# Altium PCB PCBjfet.PcbDoc
Units mm, origin at the board's own origin, x right, y up, seen from the top; angles counter-clockwise.
Board outline 70 x 50 mm, 2 copper layers (Top Layer, Bottom Layer); 10 components, 5 nets, 16 pads, 0 vias.
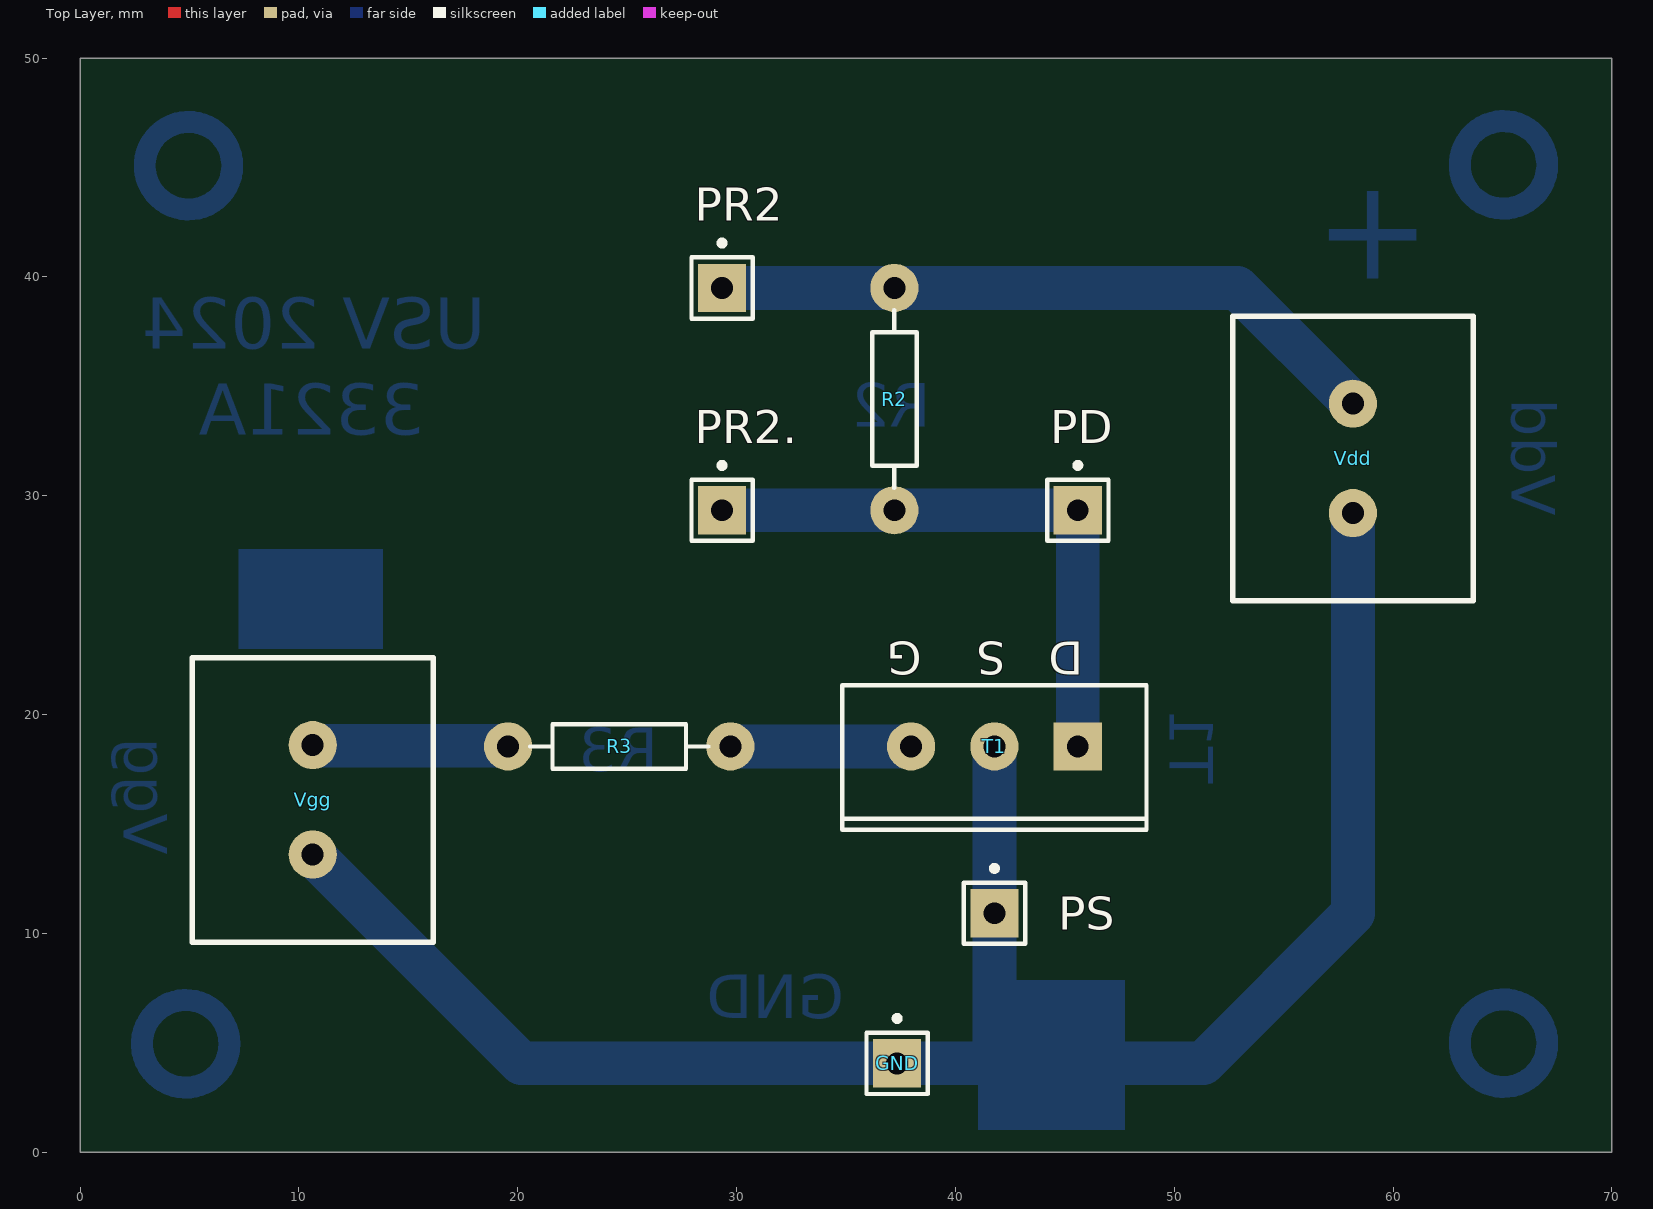
[diagram p0: Top Layer view]
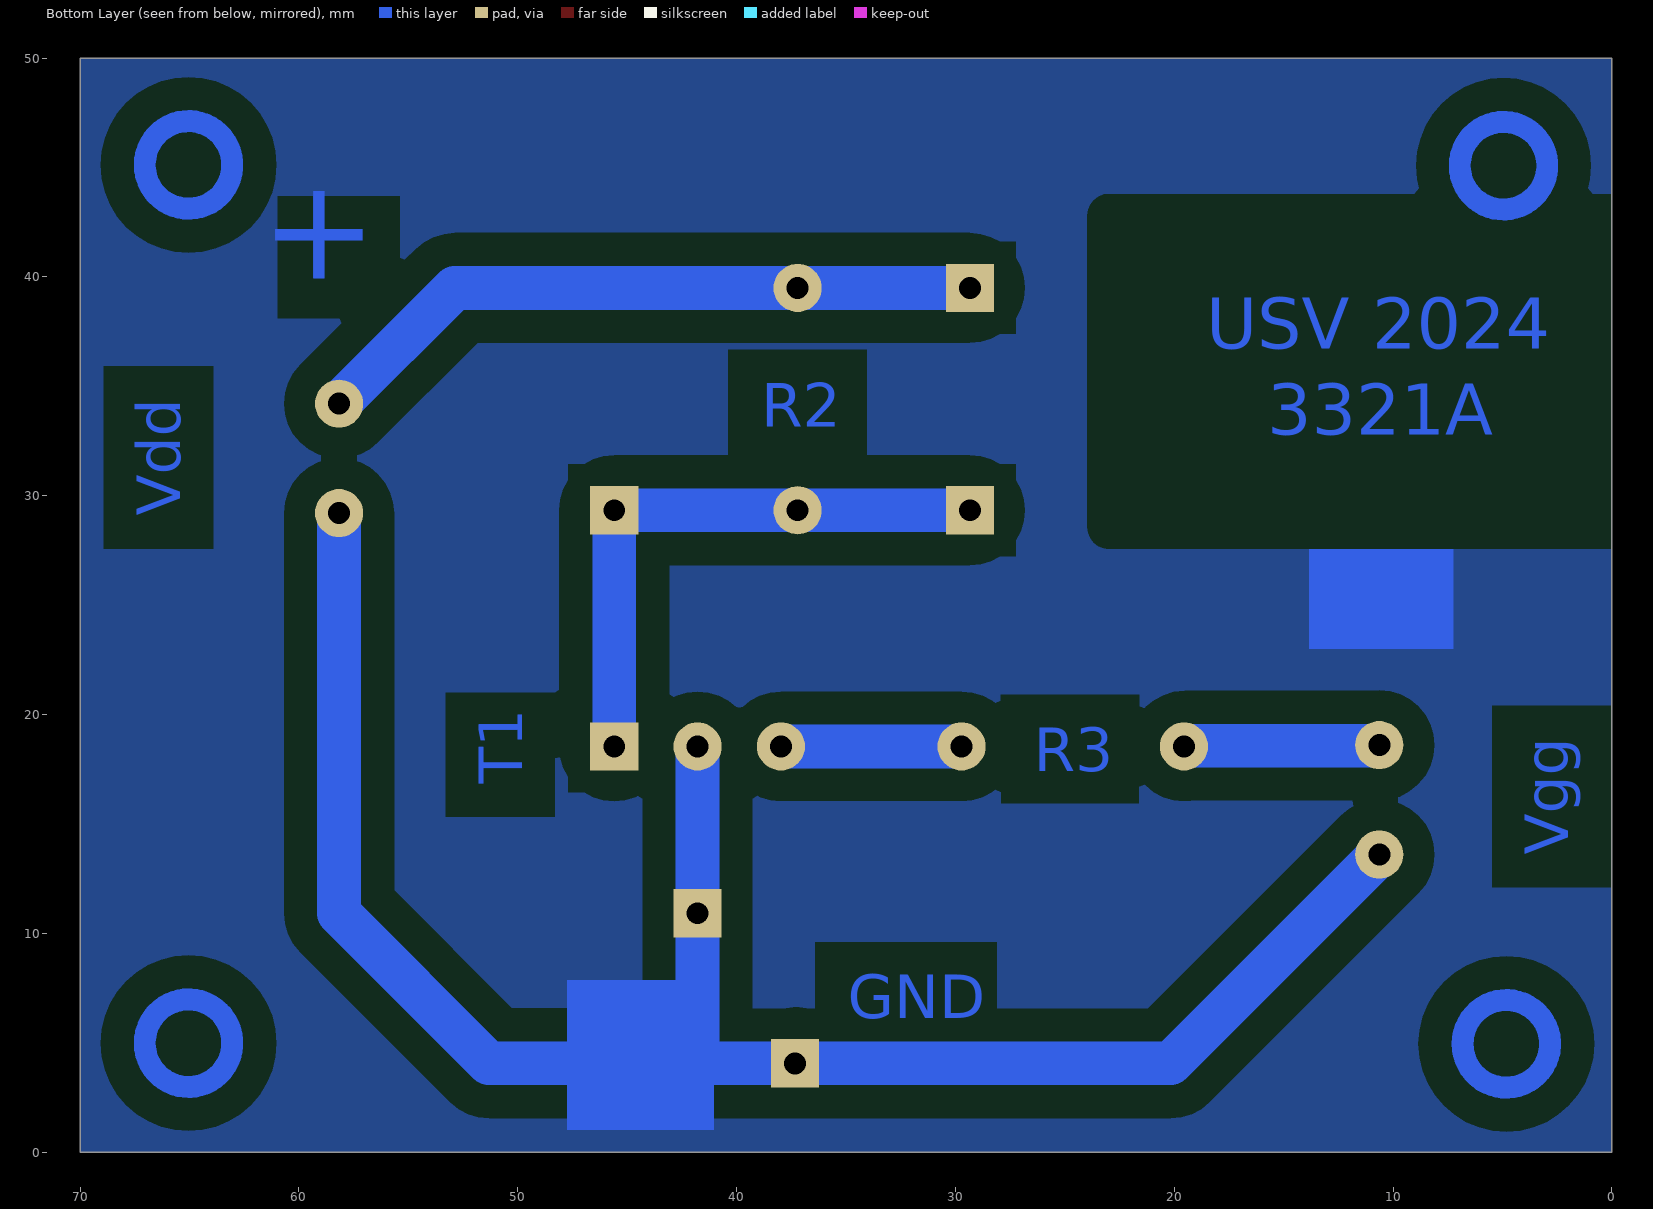
[diagram p1: Bottom Layer view, seen from below]

## Layer stack, top to bottom
Top Solder: solder mask 0.0102, Solder Resist, Dk 3.5
Top Layer: signal copper 0.0356
Dielectric 1: dielectric 0.32, FR-4, Dk 4.8
Bottom Layer: signal copper 0.0356
Bottom Solder: solder mask 0.0102, Solder Resist, Dk 3.5

## Board outline
0,0 0,50 70,50 70,0

## Design rules (kind name [scope] priority, off if disabled: settings)
Clearance [All] p1: gap=0.254 ignorepadtopadclearanceinfootprint=FALSE except(1: SMDPad-Fill SMDPad-Poly SMDPad-Region THPad-Fill THPad-Poly THPad-Region Via-Fill Via-Poly Via-Region Fill-Fill Fill-Poly Fill-Region Fill-Text Poly-Poly Poly-Region Poly-Text Region-Region Region-Text; 1.5: Arc-Fill Arc-Poly Arc-Region Track-Fill Track-Poly Track-Region)
PolygonConnect [All] p1: connectstyle=Relief reliefconductorwidth=0.254 reliefentries=4 polygonreliefangle="90 Angle" airgapwidth=0.254
RoutingVias [All] p1: holewidth=0.711 width=1.27 viastyle="Through Hole" minholewidth=0.711 minwidth=1.27 maxholewidth=0.711 maxwidth=1.27
SolderMaskExpansion [All] p1: expansion=0.102 istentingtop=FALSE
SupplyNets "Schematic Supply Nets" [InNet('GND')] p1: voltage=0.000
UnpouredPolygon [All] p1: allowunpoured=TRUE
Width [All] p1: maxlimit=3 minlimit=0.254 preferedwidth=0.8 minimp=50.000000 maximp=50.000000 favimp=50.000000
29 further rules are at their usual default settings.

## Components (designator, comment, footprint, x,y, rotation, side; value= is the part's Value field where it differs from the comment)
GND "Plug" PIN1 37.338,4.064 r0 top
PD "Plug" PIN1 45.593,29.337 r0 top
PR2 "Plug" PIN1 29.337,39.497 r0 top
PR2. "Plug" PIN1 29.337,29.337 r0 top
PS "Plug" PIN1 41.783,10.922 r0 top
R2 "Res2" AXIAL-0.4 37.211,34.417 r90 top value=470K
R3 "Res2" AXIAL-0.4 24.638,18.542 r0 top value=33K
T1 "JFET-N" TO-254-AA 41.783,18.542 r180 top
Vdd "Component_1" PCBComponent_1 52.666,25.21 r0 top
Vgg "Component_1" PCBComponent_1 16.129,22.606 r180 top

## Footprints (in the part's own frame and the unit in brackets; to place one, negate y for a bottom-side part, rotate by r counter-clockwise, add the part's x,y. Pads: shape width x height; smd on the part's side, far side on the other; paste and mask are expansions set on the pad)
AXIAL-0.4 [mm] "Axial Device, Thru-Hole; 2 Leads; 0.4 in Pin Spacing"
  round 2.2 hole 1: 1(-5.08,0) 2(5.08,0)
  silkscreen extent -4.06,-1.02 4.06,1.02
PCBComponent_1 [mm]
  round 2.2 hole 1: 1(5.5,4) 2(5.5,9)
  silkscreen extent 0,0 11,13
PIN1 [mm] "Connector; Plug"
  rect 2.2x2.2 hole 1: 1(0,0)
  silkscreen extent -1.4,-1.4 1.4,2.17
TO-254-AA [mm] "TO, Thru-Hole, Vertical, Heatsink Mounted; 3 In-Line Leads; Pitch 3.81 mm"
  rect 2.2x2.2 hole 1: 1(-3.81,0)
  round 2.2 hole 1: 2(0,0) 3(3.81,0)
  silkscreen extent -6.95,-2.8 6.95,3.8

## Part data
GND PD PR2 PR2. PS: library part CMP-022-000003-1, Component Type=Standard, Design Item ID=Plug, LatestRevisionDate=17-Jul-2002, LatestRevisionNote="Re-released for DXP Platform.", Pin Count=1, Publisher="Altium Limited", Source="Miscellaneous Connectors.SchLib"
R2 R3: "Resistor", LatestRevisionDate=17-Jul-2002, LatestRevisionNote="Re-released for DXP Platform.", PackageDescription="Axial Device, Thru-Hole; 2 Leads; 0.4 in Pin Spacing", PackageReference=AXIAL-0.4, Published=8-Jun-2000, Publisher="Altium Limited"
T1: library part CMP-019-000008-1, "N-Channel JFET", Code_JEDEC=TO-254-AA, Component Type=Standard, Design Item ID=JFET-N, LatestRevisionDate=17-Jul-2002, LatestRevisionNote="Re-released for DXP Platform.", PackageReference=TO-254-AA, Pin Count=3, Published=8-Jun-2000, Publisher="Altium Limited", Source="Miscellaneous Devices.SchLib"
Vdd Vgg: library part CMP-041-000000-1, Design Item ID=Component_1, Source=HeaderCustom0_5.SchLib

## Nets (pads, with @x,y where several pads share a name; then routed paths per layer and width w, separated by ;. In a path a pad name is that pad's centre, name@x,y a point inside that pad or via, vN(x,y) a via of type N, cw(c..) or ccw(c..) an arc to the next point about the centre after c; other vN are vias at no path point)
GND: GND.1 PS.1 T1.2 Vdd.1 Vgg.2 | length 87.2
  Bottom Layer w2: Vgg.2 20.171,4.064 GND.1 ; GND.1@37.274,4.127 GND.1 ; T1.2 PS.1 41.783,8.128 41.783,4.064 ; Vdd.1 58.166,10.922 51.308,4.064 41.783,4.064 ; GND.1 41.783,4.064
NetPD_1: PD.1 PR2..1 R2.1 T1.1 | length 27.1
  Bottom Layer w2: PR2..1 R2.1 PD.1 T1.1
NetPR2_1: PR2.1 R2.2 Vdd.2 | length 31
  Bottom Layer w2: PR2.1 R2.2 52.879,39.497 Vdd.2
NetR3_1: R3.1 Vgg.1 | length 9
  Bottom Layer w2: Vgg.1 10.661,18.574 19.526,18.574 R3.1
NetR3_2: R3.2 T1.3 | length 8.3
  Bottom Layer w2: R3.2 T1.3
copper on no net: | length 50.3
  Bottom Layer w1: 6.826,4.953 ccw(c4.826,4.953) 6.826,4.953 ; 6.953,45.085 ccw(c4.953,45.085) 6.953,45.085 ; 67.046,4.986 ccw(c65.046,4.986) 67.046,4.986 ; 67.046,45.118 ccw(c65.046,45.118) 67.046,45.118

## Polygon pours and split planes (outlines as drawn)
no net on Bottom Layer "NONET_L02_P000" (solid, pour order 0): 0,50 70,50 70,0 0,0

## Other copper
Bottom Layer:
  rectangle: 7.239,22.987 13.843,27.566
  rectangle net GND: 41.021,1.016 47.752,7.874
  text "+" at 56.388,38.375 h8
  text "USV 2024" at 18.542,35.941 h4
  text "3321A" at 15.748,32.004 h4

## Silkscreen, mask and mechanical layers (free items; w line width, h text height)
Mechanical 1:
  the board outline again, w0.254

## Text inside footprints (layer, text, board x,y; h text height)
T1: Top Overlay "D" at 45.843,23.317 h1.5 r180; Top Overlay "S" at 42.283,23.317 h1.5 r180; Top Overlay "G" at 38.473,23.317 h1.5 r180